# EAGLE board sra_20_v8.7 (EAGLE 9.5.2)
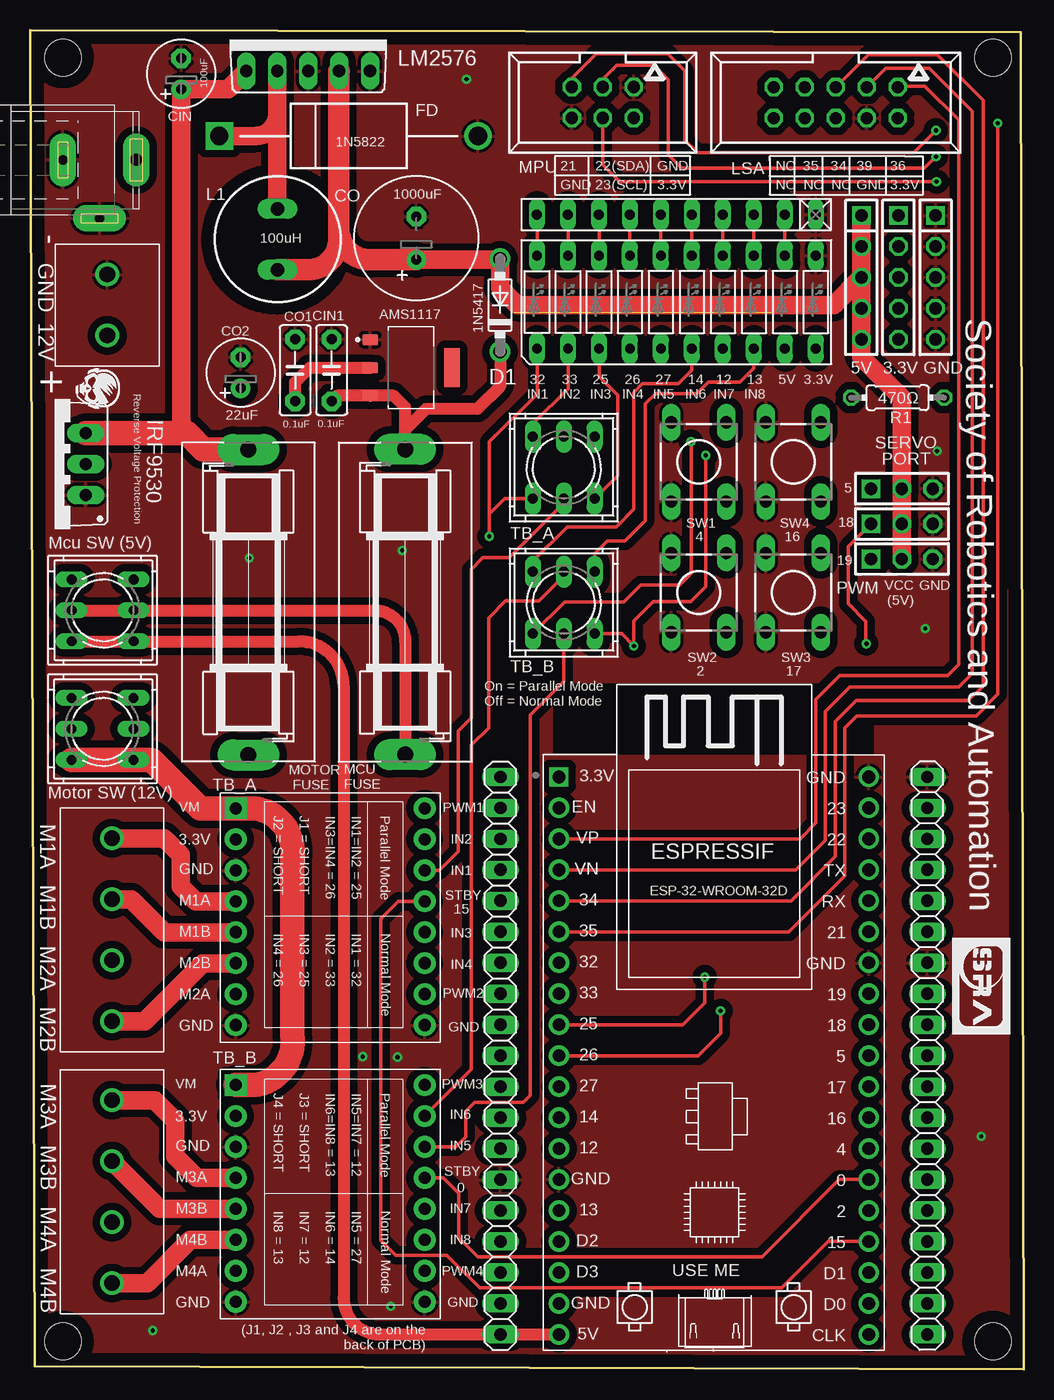
[diagram p0: board, top side]
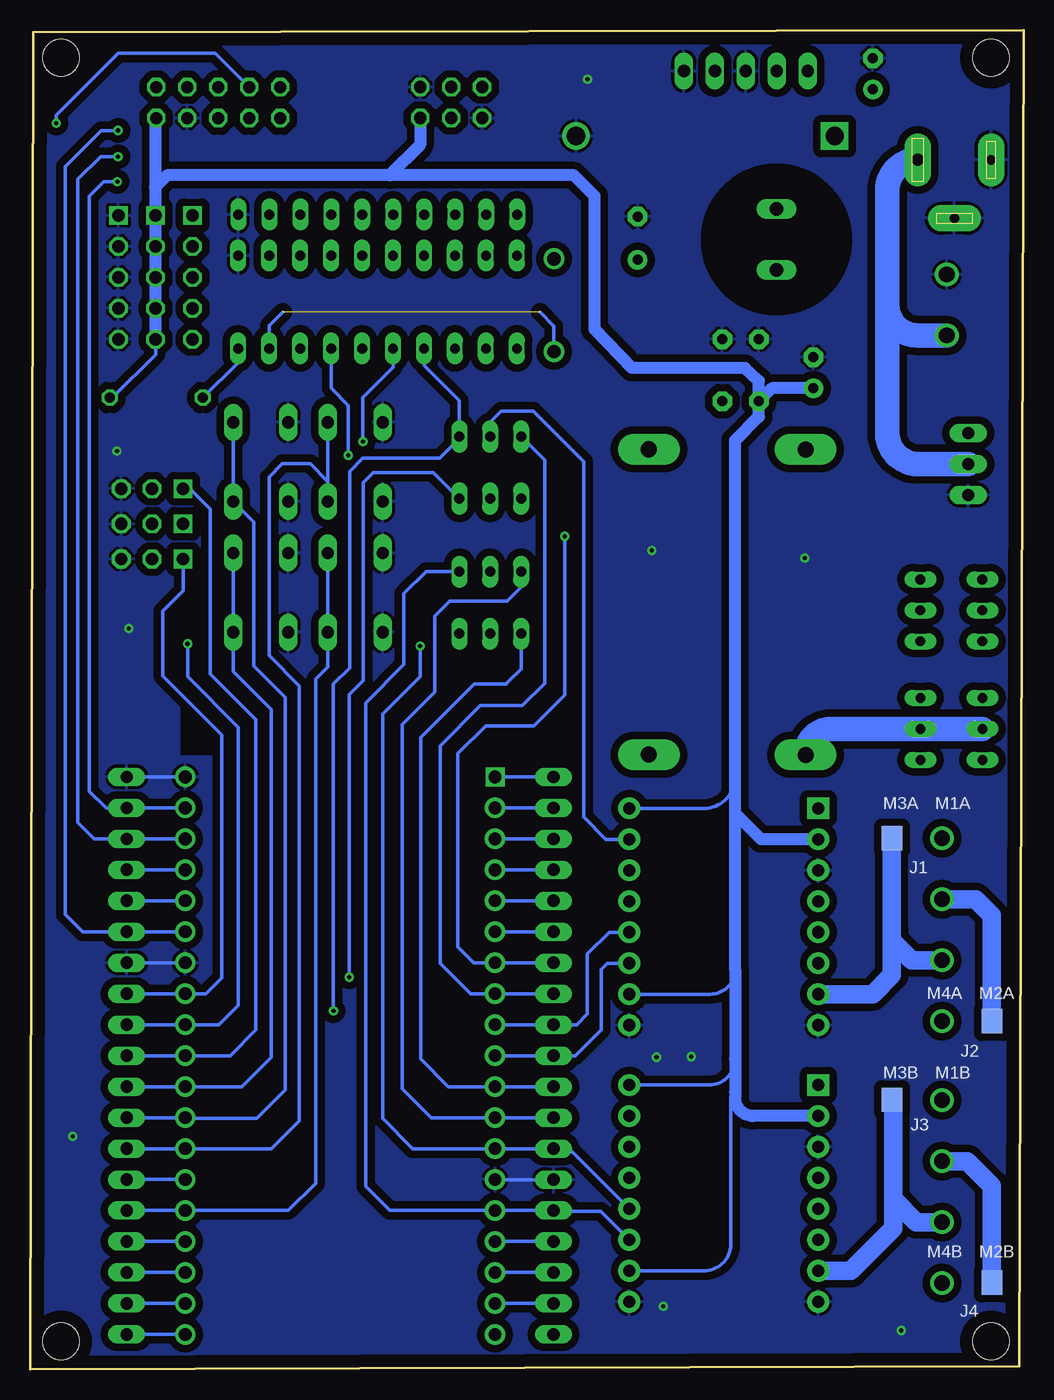
[diagram p1: board, bottom side, seen from below]

Size 81.41 x 109.77 mm. Coordinates in mm from the lower left corner, seen from the top.
Outline: 81.17,109.64 81.41,0 0.33,0.24 0,109.77 81.17,109.64
Copper layers (1*16): Top 0.035mm / dielectric 1.5mm / Bottom 0.035mm
Design rules "default": minimum track width 6mil, minimum drill 0.35mm, track to track 6mil, track to pad 6mil, pad to pad 6mil, via to via 6mil, smd to smd 6mil, copper to edge 40mil, drill to drill 6mil, minimum pad ring 10mil, minimum via ring 8mil, stop-mask expansion 4mil, vias tented up to drill 0mil, thermal gap 10mil
Holes 3 mm at 2.67,2.27 78.9,2.27 2.67,107.54 78.9,107.54

## Footprints (pad centres in the part's own frame; a part is rotated, then mirrored left to right if it is on the bottom)
691131710002 = drill 1.3: 1 -2.5,0; 2 2.5,0
SOT229P700X180-4N = smd 0.93 x 1.31: 1 -2.29,-3.345; 2 0,-3.345; 3 2.29,-3.345 | smd 3.24 x 1.31: 4 0,3.345
E2,5-6 = drill 0.813 pad 1.6: + -1.27,0 | drill 0.813 pad 1.6 octagon: - 1.27,0
C5B2.5 = drill 0.813 pad 1.6 octagon: 1 -2.54,0; 2 2.54,0
E3,5-10 = drill 0.813 pad 1.6: + -1.778,0 | drill 0.813 pad 1.6 octagon: - 1.778,0
DO41-7.6 = drill 1.1 pad 1.7: A 3.81,0; C -3.81,0
SH25 = drill 1.321 pad 2.54 long: 1 -12.522,0; 2 12.522,0
DIOAD2120W130L950D530P = drill 1.5 pad 2.25: A 10.6,0 | drill 1.5 pad 2.25 square: C -10.6,0
691131710004 = drill 1.3: 1 -7.5,0; 2 -2.5,0; 3 2.5,0; 4 7.5,0
1X19 = drill 1.016 long: 1 -22.86,0; 2 -20.32,0; 3 -17.78,0; 4 -15.24,0; 5 -12.7,0; 6 -10.16,0; 7 -7.62,0; 8 -5.08,0; 9 -2.54,0; 10 0,0; 11 2.54,0; 12 5.08,0; 13 7.62,0; 14 10.16,0; 15 12.7,0; 16 15.24,0; 17 17.78,0; 18 20.32,0; 19 22.86,0
1X03 = drill 1.016 square: 1 -2.54,0 | drill 1.016 octagon: 2 0,0; 3 2.54,0
1X05 = drill 1.016 square: 1 -5.08,0 | drill 1.016 octagon: 2 -2.54,0; 3 0,0; 4 2.54,0; 5 5.08,0
1X05' = drill 1.016 long: 1 -5.08,0; 2 -2.54,0; 3 0,0; 4 2.54,0; 5 5.08,0
SD12K100 = drill 1.1 long: 1 -2.5,0; 2 2.5,0
LB10 = drill 0.813 long: 1 -11.43,-3.81; 2 -8.89,-3.81; 3 -6.35,-3.81; 4 -3.81,-3.81; 5 -1.27,-3.81; 6 1.27,-3.81; 7 3.81,-3.81; 8 6.35,-3.81; 9 8.89,-3.81; 10 11.43,-3.81; 11 11.43,3.81; 12 8.89,3.81; 13 6.35,3.81; 14 3.81,3.81; 15 1.27,3.81; 16 -1.27,3.81; 17 -3.81,3.81; 18 -6.35,3.81; 19 -8.89,3.81; 20 -11.43,3.81
057-010-1 = drill 1 octagon: 1 -5.08,-1.27; 2 -5.08,1.27; 3 -2.54,-1.27; 4 -2.54,1.27; 5 0,-1.27; 6 0,1.27; 7 2.54,-1.27; 8 2.54,1.27; 9 5.08,-1.27; 10 5.08,1.27
9077-2 = drill 0.813 long: 1 -2.54,2.54; 2 0,2.54; 3 2.54,2.54; 4 -2.54,-2.54; 5 0,-2.54; 6 2.54,-2.54
SMD1,27-2,54 = smd 1.7 x 2 bottom: 1 0,0
SPC4078 = drill 0.8 pad 2.184 long: 1 -3,0; 2 0,-4.8 | drill 1 pad 2.184 long: 3 3,0
TO220BV = drill 1.016 long: D 0,-2.54; G -2.54,-2.54; S 2.54,-2.54
0204/7 = drill 0.813 octagon: 1 -3.81,0; 2 3.81,0
RN-10 = drill 0.813 long: 1 -11.43,0; 2 -8.89,0; 3 -6.35,0; 4 -3.81,0; 5 -1.27,0; 6 1.27,0; 7 3.81,0; 8 6.35,0; 9 8.89,0; 10 11.43,0
DTS-6 = drill 1 long: 1 -3.25,2.25; 2 3.25,2.25; 3 -3.25,-2.25; 4 3.25,-2.25
TB6612FNG = drill 1 pad 1.778: A1 -7.62,-1.27; A2 -7.62,-3.81; AIN1 7.874,1.27; AIN2 7.874,3.81; B1 -7.62,-8.89; B2 -7.62,-6.35; BIN1 7.874,-3.81; BIN2 7.874,-6.35; GND1 -7.62,1.27; GND2 -7.62,-11.43; GND3 7.874,-11.43; PWMA 7.874,6.35; PWMB 7.874,-8.89; STBY 7.874,-1.27; VCC -7.62,3.81 | drill 1 pad 1.778 square: VM -7.62,6.35
MODULE_ESP32-DEVKITC-32D = drill 1.04 square: 1 -12.7,19.76 | drill 1.04 pad 1.676: 2 -12.7,17.22; 3 -12.7,14.68; 4 -12.7,12.14; 5 -12.7,9.6; 6 -12.7,7.06; 7 -12.7,4.52; 8 -12.7,1.98; 9 -12.7,-0.56; 10 -12.7,-3.1; 11 -12.7,-5.64; 12 -12.7,-8.18; 13 -12.7,-10.72; 14 -12.7,-13.26; 15 -12.7,-15.8; 16 -12.7,-18.34; 17 -12.7,-20.88; 18 -12.7,-23.42; 19 -12.7,-25.96; 20 12.7,19.76; 21 12.7,17.22; 22 12.7,14.68; 23 12.7,12.14; 24 12.7,9.6; 25 12.7,7.06; 26 12.7,4.52; 27 12.7,1.98; 28 12.7,-0.56; 29 12.7,-3.1; 30 12.7,-5.64; 31 12.7,-8.18; 32 12.7,-10.72; 33 12.7,-13.26; 34 12.7,-15.8; 35 12.7,-18.34; 36 12.7,-20.88; 37 12.7,-23.42; 38 12.7,-25.96
057-006-1 = drill 1 octagon: 1 -2.54,-1.27; 2 -2.54,1.27; 3 0,-1.27; 4 0,1.27; 5 2.54,-1.27; 6 2.54,1.27

## Placement (x,y rotation side)
12V  [691131710002]  6.29,87.27 90 top
AMS1117  AMS1117-3.3  [SOT229P700X180-4N]  31.21,82.12 270 top
CIN  100uF  [E2,5-6]  12.36,106.22 90 top
CIN1  0.1uF  [C5B2.5]  24.69,81.91 270 top
CO  1000uF  [E3,5-10]  31.63,92.74 90 top
CO1  0.1uF  [C5B2.5]  21.69,81.91 270 top
CO2  22uF  [E2,5-6]  17.22,81.7 90 top
D1  1N5817-B  [DO41-7.6]  38.49,87.25 90 top
F2  3A  [SH25]  30.72,62.91 90 top
F3  3A  [SH25]  17.86,62.89 270 top
FD  1N5822  [DIOAD2120W130L950D530P]  26.08,101.12 0 top
J1  [691131710004]  6.68,36.03 270 top
J2  [691131710004]  6.68,14.55 270 top
JP1  [1X19]  73.52,25.7 270 top
JP2  [1X19]  38.52,25.7 90 top
JP3  [1X03]  71.43,66.43 0 top
JP4  [1X05]  74.2,89.53 270 top
JP5  [1X03]  71.43,69.31 0 top
JP6  [1X05']  22.77,106.44 0 top
JP7  [1X05]  68.12,89.53 270 top
JP8  [1X03]  71.43,72.2 0 top
JP10  [1X05]  71.16,89.53 270 top
L1  100uH  [SD12K100]  20.26,92.65 90 top
LDZ1  LB10  [LB10]  52.96,87.51 0 top
LINE-SENSOR  057-010-1  [057-010-1]  66.02,103.86 180 top
MCU-S/W  9077-2  [9077-2]  5.92,62.22 90 top
MOTOR-S/W  9077-2  [9077-2]  5.9,52.5 90 top
PAD1  [SMD1,27-2,54]  10.79,43.53 0 top
PAD2  [SMD1,27-2,54]  2.59,28.53 0 top
PAD3  [SMD1,27-2,54]  10.79,22.08 0 top
PAD4  [SMD1,27-2,54]  2.59,7.08 0 top
POWER-JACK  [SPC4078]  5.66,99.17 0 top
Q2  IRF9530  [TO220BV]  1.99,74.22 90 top
R1  470Ω  [0204/7]  71.09,79.66 0 top
RN2  [RN-10]  52.94,94.68 180 top
SW1  DTS-6  [DTS-6]  54.78,74.39 270 top
SW2  DTS-6  [DTS-6]  54.78,63.68 270 top
SW3  DTS-6  [DTS-6]  62.53,63.68 270 top
SW4  DTS-6  [DTS-6]  62.53,74.39 270 top
TB1  TB6612FNG  [TB6612FNG]  24.44,39.63 0 top
TB2  TB6612FNG  [TB6612FNG]  24.44,16.94 0 top
TB_A  9077-2  [9077-2]  43.72,73.93 180 top
TB_B  9077-2  [9077-2]  43.72,62.84 180 top
U1  ESP32-DEVKITC-32D  [MODULE_ESP32-DEVKITC-32D]  56.02,28.8 0 top
X1  057-006-1  [057-006-1]  46.92,103.87 180 top

## Library data of the parts
12V J1 J2 = Wurth_Elektronik_Electromechanic_Terminal_Blocks_Connectors_rev16b
AMS1117 = AMS1117-3.3; AVAILABILITY: Unavailable; DESCRIPTION: Sot223/Pkg 1-Amp 3.3-Volt Low Drop Out Voltage Regulatator; MF: Advanced Monolithic Systems; MP: AMS1117-3.3; PACKAGE: None; PRICE: None
CIN CO CO2 = rcl; SPICEPREFIX: C
CIN1 CO1 = capacitor-wima
D1 = diode
F2 F3 = fuse; MF: SCHURTER; MPN: 0031.8211; OC_FARNELL: 1162741; OC_NEWARK: 96B9380
FD = 1N5822; AVAILABILITY: Unavailable; MF: ON Semiconductor; MP: 1N5822; PACKAGE: DO-201AD-201 CDIL; PRICE: None
JP1 JP2 JP6 = pinhead
JP3-JP5 JP7 JP8 JP10 = pinhead_2
L1 = inductor-neosid; OC_FARNELL: unknown; OC_NEWARK: unknown
LDZ1 = led
LINE-SENSOR X1 = con-panduit; OC_FARNELL: unknown; OC_NEWARK: unknown
MCU-S/W MOTOR-S/W TB_A TB_B = switch-misc
PAD1-PAD4 = wirepad_2
POWER-JACK = con-jack; OC_FARNELL: unknown; OC_NEWARK: unknown
Q2 = transistor-power
R1 = rcl; SPICEPREFIX: R
RN2 = resistor-net; OC_FARNELL: unknown; OC_NEWARK: unknown
SW1-SW4 = switch-tact
TB1 TB2 = TB6612FNG
U1 = ESP32-DEVKITC-32D; AVAILABILITY: Unavailable; DESCRIPTION: - Transceiver; 802.11 b/g/n _Wi-Fi, WiFi, WLAN_, Bluetooth® Smart Ready 4.x Dual Mode For Use With ESP-WROOM-32; MF: Espressif Systems; MP: ESP32-DEVKITC-32D; PACKAGE: None; PRICE: None

## Nets
0: 12V.2 AMS1117.1 CIN1.1 CIN.- CO1.1 CO2.- CO.- FD.A JP1.1 JP1.7 JP2.6 JP3.3 JP4.1 JP4.2 JP4.3 JP4.4 JP4.5 JP5.3 JP6.3 JP6.5 JP8.3 LDZ1.11 LINE-SENSOR.4 POWER-JACK.1 POWER-JACK.2 Q2.G RN2.1 SW1.3 SW1.4 SW2.3 SW2.4 SW3.3 SW3.4 SW4.3 SW4.4 TB1.GND1 TB1.GND2 TB1.GND3 TB2.GND1 TB2.GND2 TB2.GND3 U1.14 U1.20 U1.26 X1.1 X1.6
2: JP1.15 SW2.1 SW2.2 U1.34
2L: LDZ1.20 RN2.10
3.3V: AMS1117.2 CO1.2 CO2.+ JP10.1 JP10.2 JP10.3 JP10.4 JP10.5 LINE-SENSOR.2 R1.2 TB1.PWMA TB1.PWMB TB1.VCC TB2.PWMA TB2.PWMB TB2.VCC X1.2
3L: LDZ1.19 RN2.9
3V3: JP2.19 U1.1
4: JP1.13 SW1.1 SW1.2 U1.32
4L: LDZ1.18 RN2.8
5: JP1.10 JP8.1 U1.29
5_AF: F2.1 MCU-S/W.2 MCU-S/W.5
5L: LDZ1.17 RN2.7
5V: CO.+ D1.A JP3.2 JP5.2 JP6.4 JP7.1 JP7.2 JP7.3 JP7.4 JP7.5 JP8.2 L1.1
5V_P: JP2.1 MCU-S/W.1 MCU-S/W.4 U1.19
6L: LDZ1.16 RN2.6
7L: LDZ1.15 RN2.5
8L: LDZ1.14 RN2.4
9L: LDZ1.13 RN2.3
10L: LDZ1.12 RN2.2
12: JP2.7 LDZ1.7 TB2.BIN1 TB_B.1 U1.13
12V: CIN.+ F3.1 JP6.1 Q2.S
12V_AF: F3.2 MOTOR-S/W.2 MOTOR-S/W.5
12V_P: MOTOR-S/W.1 MOTOR-S/W.4 TB1.VM TB2.VM
12V_U: 12V.1 POWER-JACK.3 Q2.D
13: JP2.5 LDZ1.8 TB2.BIN2 TB_B.4 U1.15
14: JP2.8 LDZ1.6 TB_B.6 U1.12
15: JP1.16 TB1.STBY U1.35
16: JP1.12 SW4.1 SW4.2 U1.31
17: JP1.11 SW3.1 SW3.2 U1.30
18: JP1.9 JP5.1 U1.28
19: JP1.8 JP3.1 U1.27
21: JP1.6 U1.25 X1.5
22: JP1.3 U1.22 X1.3
23: JP1.2 U1.21 X1.4
25: JP2.11 LDZ1.3 TB1.BIN1 TB_A.1 U1.9
26: JP2.10 LDZ1.4 TB1.BIN2 TB_A.4 U1.10
27: JP2.9 LDZ1.5 TB_B.3 U1.11
32: JP2.13 LDZ1.1 TB_A.3 U1.7
33: JP2.12 LDZ1.2 TB_A.6 U1.8
34: JP2.15 LINE-SENSOR.5 U1.5
35: JP2.14 LINE-SENSOR.7 U1.6
36: JP2.17 LINE-SENSOR.1 U1.3
39: JP2.16 LINE-SENSOR.3 U1.4
AIN1: TB1.AIN1 TB_A.2
AIN2: TB1.AIN2 TB_A.5
AMS_IN: AMS1117.3 CIN1.2 D1.C F2.2 LDZ1.9
BIN1: TB2.AIN1 TB_B.2
BIN2: TB2.AIN2 TB_B.5
CLK: JP1.19 U1.38
CMD: JP2.2 U1.18
EN: JP2.18 U1.2
N$1: LDZ1.10 R1.1
N$11: FD.C JP6.2 L1.2
NC1: LINE-SENSOR.6
NC2: LINE-SENSOR.8
NC3: LINE-SENSOR.10
NC4: LINE-SENSOR.9
O: JP1.14 TB2.STBY U1.33
OUT1A: J1.1 TB1.A1
OUT1B: J2.1 TB2.A1
OUT2A: J1.2 PAD2.1 TB1.A2
OUT2B: J2.2 PAD4.1 TB2.A2
OUT3A: J1.3 PAD1.1 TB1.B1
OUT3B: J2.3 PAD3.1 TB2.B1
OUT4A: J1.4 TB1.B2
OUT4B: J2.4 TB2.B2
RX: JP1.5 U1.24
SD0: JP1.18 U1.37
SD1: JP1.17 U1.36
SD2: JP2.4 U1.16
SD3: JP2.3 U1.17
TX: JP1.4 U1.23

## Tracks (layer width: path | path; a pad name or v marks a point on that pad's centre or on a via)
0  (via drill 0.35)
  Bottom 0.305: JP2.6 U1.14 | U1.26 JP1.7 | U1.20 JP1.1
  other vias: 29.53,5.15 77.94,19.08 30.47,67.13 17.93,66.5 10.03,3.16 30.09,25.57 27.24,25.62 35.74,105.78 74.33,75.28 73.35,60.74
  pour Bottom (isolate 0.61, rank 2): -2.4,110.93 -2.4,-1.76 4.43,-1.76 83.17,-1.76 83.17,5.02 83.17,110.94 -2.4,110.94
  pour Top (isolate 0.61, rank 2): -2.39,110.92 -2.39,-1.77 0.35,-1.77 83.18,-1.77 83.18,3.12 83.18,110.93 -2.39,110.93
  cutout Top: 42.95,50.39 42.95,56.14 43,56.19 69.05,56.19 69.05,50.44 42.95,50.44
  cutout Bottom: 42.95,50.39 42.95,56.19 48.9,56.19 69.05,56.19 69.05,50.44 42.95,50.44
2
  Bottom 0.305: SW2.1 SW2.2 57.03,57.58 58.04,56.57 58.04,15.22 60.26,13 U1.34 JP1.15
2L
  Top 0.305: LDZ1.20 41.53,94.67 RN2.10
3.3V
  Top 1: CO1.2 21.69,80.93 22.88,82.12 AMS1117.2
  Bottom 0.305: TB1.PWMB 25.68,30.74 arc-90 23.65,32.77 | TB2.PWMA 25.79,23.29 arc-90 23.65,25.44 | TB2.PWMB 26.19,8.05 arc-90 24.01,10.23 24.01,22.36 23.65,22.72 | TB1.PWMA 26.17,45.98 arc-90 23.65,48.5 | JP10.5 71.16,83.21 74.7,79.66 R1.2
  Bottom 1: TB2.VCC 22.15,20.75 arc90 23.65,22.26 23.65,22.72 23.65,25.44 23.65,32.77 23.65,45.58 | CO2.+ 20.63,80.43 CO1.2 | CO1.2 21.69,81.03 22.85,82.09 32.08,82.09 35.16,85.26 35.16,96.2 36.86,97.89 51.95,97.89 | 71.19,96.92 70.21,97.89 51.95,97.89 | 71.19,96.92 71.2,96.91 71.2,102.49 LINE-SENSOR.2 | 71.19,96.92 71.19,94.64 JP10.1 JP10.2 JP10.3 JP10.4 JP10.5 | X1.2 49.46,100.38 51.95,97.89 | 23.65,45.58 23.65,48.5 23.65,76.14 21.69,78.1 CO1.2 | TB1.VCC 21.51,43.44 23.65,45.58
3L
  Top 0.305: LDZ1.19 44.07,94.67 RN2.9
3V3
  Bottom 0.305: JP2.19 U1.1
4
  Bottom 0.305: SW1.1 SW1.2 57.03,72.79 58.48,74.24 60.77,74.24 61.85,73.17 61.85,58.5 59.37,56.02 59.37,20.36 61.65,18.08 U1.32 JP1.13
4L
  Top 0.305: LDZ1.18 46.61,94.67 RN2.8
5
  Bottom 0.305: JP1.10 U1.29 65.04,25.7 62.93,27.81 62.93,53.25 66.67,56.99 66.67,70.53 68.34,72.2 JP8.1
5_AF
  Top 1: MCU-S/W.2 MCU-S/W.5 28.18,62.22 arc-90 30.72,59.68 F2.1
5L
  Top 0.305: LDZ1.17 49.15,94.67 RN2.7
5V
  Top 1.5: JP7.3 JP7.4 JP7.5 68.12,82.99 71.43,79.67 JP8.2 JP5.2 JP3.2 | JP7.3 JP7.2 JP7.1 | JP7.3 65.86,87.27 39.89,87.27 38.49,88.66 D1.A 38.4,90.96 CO.+
  Top 1.75: 25.28,93.5 25.28,92.69 arc-90 22.74,90.15 L1.1 | CO.+ 27.82,90.96 arc-90 25.28,93.5 | 25.28,93.5 25.28,106.41 arc-90 JP6.4
5V_P
  Top 1: U1.19 arc90 U1.19 arc-90 U1.19 | MCU-S/W.1 MCU-S/W.4 22.01,59.68 arc-90 25.67,56.02 25.67,5.82 arc90 28.66,2.83 JP2.1 U1.19
6L
  Top 0.305: LDZ1.16 51.69,94.67 RN2.6
7L
  Top 0.305: LDZ1.15 54.23,94.67 RN2.5
8L
  Top 0.305: LDZ1.14 56.77,94.67 RN2.4
9L
  Top 0.305: LDZ1.13 59.31,94.67 RN2.3
10L
  Top 0.305: LDZ1.12 61.85,94.67 RN2.2
12  (via drill 0.35)
  Top 0.305: TB_B.1 48.46,60.3 v49.47,59.29 49.47,61.35 51.06,62.94 54.14,62.94 55.37,64.17 v55.37,74.94
  Bottom 0.305: v49.47,59.29 49.47,56.78 52.54,53.71 52.54,20.55 50.06,18.08 U1.13 JP2.7 37.26,18.07 TB2.BIN1 | LDZ1.7 56.77,80.43 55.37,79.03 v55.37,74.94
12V
  Top 1.5: JP6.1 16.19,104.95 CIN.+ 12.36,77.46 14.41,75.41 15.08,75.41
  Top 2: Q2.S 12.84,76.76 14.18,75.41 15.08,75.41 F3.1
12V_AF
  Bottom 2: F3.2 arc90 15.73,52.5 MOTOR-S/W.5 MOTOR-S/W.2
12V_P
  Top 2: TB2.VM 18.39,23.29 arc90 21.46,27.36 21.46,41.91 arc90 18.39,45.98 TB1.VM 13.93,45.98 9.95,49.96 MOTOR-S/W.4 MOTOR-S/W.1
12V_U
  Bottom 2: Q2.D 8.62,74.22 arc90 11.16,76.76 11.16,87.25 | POWER-JACK.3 arc-90 11.16,96.67 11.16,87.25 | 12V.1 8.68,84.77 arc90 11.16,87.25
13
  Top 0.305: TB_B.4 46.26,66.88 47.27,67.9 48.72,67.9 50.4,69.58 50.4,79.16 51.25,80 54.61,80 55.55,80.94 58.16,80.94 59.31,82.08 LDZ1.8
  Bottom 0.305: TB_B.4 46.28,65.41 48.98,65.41 50.8,63.6 50.8,57.77 53.94,54.62 53.94,15 51.94,13 U1.15 JP2.5 38.48,12.95 34.67,12.95 TB2.BIN2
14
  Top 0.305: LDZ1.6 54.23,81.91 53.11,80.79 50.17,80.79 49.47,80.09 49.47,70.51 48.02,69.07 43.99,69.07 41.15,66.23 41.15,65.42 TB_B.6
  Bottom 0.305: TB_B.6 41.18,64.13 42.31,63 47.03,63 48.26,61.76 48.26,55.51 50.92,52.86 50.92,22.99 48.55,20.62 U1.12 JP2.8
15
  Top 0.305: U1.35 65.42,10.46 61.6,6.64 36.82,6.64 34.12,9.33 29.94,9.33 28.71,10.56 28.71,36.93 30.14,38.36 TB1.STBY
  Bottom 0.305: U1.35 JP1.16
16
  Bottom 0.305: SW4.1 SW4.2 63.11,69.47 63.11,57.66 60.51,55.07 60.51,22.89 62.87,20.54 68.64,20.54 U1.31 JP1.12
17
  Bottom 0.305: JP1.11 U1.30 64.07,23.16 61.65,25.57 61.65,54.07 64.78,57.19 SW3.2 SW3.1
18  (via drill 0.35)
  Top 0.305: JP5.1 67.03,67.45 67.03,62.77 68.5,61.31 68.5,59.49 v68.53,59.49
  Bottom 0.305: v68.53,59.49 68.53,56.78 64.36,52.61 64.36,29.83 65.96,28.24 U1.28 JP1.9
19
  Bottom 0.305: JP3.1 68.89,63.85 70.58,62.16 70.58,56.83 65.72,51.98 65.72,32.09 67.04,30.78 U1.27 JP1.8
21  (via drill 0.35)
  Top 0.305: X1.5 44.38,105.87 46.39,107.88 52.23,107.88 53.64,106.48 53.64,100.79 54.69,99.74 72.4,99.74 v74.23,101.57
  Bottom 0.305: v74.23,101.57 75.59,101.57 78.55,98.61 78.55,37.3 77.1,35.85 JP1.6 U1.25
22  (via drill 0.35)
  Top 0.305: X1.3 46.92,105.78 48.07,106.93 51.08,106.93 52.28,105.73 52.28,99.58 53.37,98.48 73.28,98.48 v74.23,99.43
  Bottom 0.305: v74.23,99.43 75.65,99.43 77.52,97.56 77.52,44.82 76.17,43.47 JP1.3 U1.22
23  (via drill 0.35)
  Top 0.305: X1.4 46.92,98.76 48.31,97.37 v74.29,97.37
  Bottom 0.305: v74.29,97.37 75.41,97.37 76.59,96.19 76.59,93.28 76.58,93.27 76.58,47.38 75.21,46.01 JP1.2 U1.21
25  (via drill 0.35)
  Top 0.305: v55.27,32.14 55.27,30.03 53.48,28.24 U1.9 | LDZ1.3 46.61,81.39 48.14,79.86 48.14,73.27 TB_A.1
  Bottom 0.305: TB_A.1 48.39,73.52 53.3,73.52 54.12,72.69 54.12,56.46 55.27,55.31 v55.27,32.15 v55.27,32.14 | TB1.BIN1 33.98,35.82 35.75,34.05 35.75,29.11 36.63,28.23 JP2.11 U1.9
26  (via drill 0.35)
  Top 0.305: v56.58,29.38 56.58,27.53 54.75,25.7 U1.10
  Bottom 0.305: v56.58,29.38 56.58,56.16 55.23,57.5 55.23,73.61 54.15,74.69 47.88,74.69 47.88,74.7 46.26,76.32 TB_A.4 46.26,79.41 49.15,82.29 LDZ1.4 | TB1.BIN2 34.11,33.28 34.63,32.76 34.63,27.82 36.76,25.69 JP2.10 U1.10
27  (via drill 0.35)
  Top 0.305: v54.15,76.05 54.15,65.22 53.21,64.28 50.01,64.28 48.65,62.91 43.79,62.91 TB_B.3
  Bottom 0.305: TB_B.3 41.18,57.42 42.26,56.34 42.37,56.24 42.41,56.19 45.03,56.19 49.42,51.8 49.42,25.43 47.15,23.16 U1.11 JP2.9 | LDZ1.5 51.69,82.15 54.15,79.68 v54.15,76.05
32  (via drill 0.35)
  Top 0.305: v37.61,68.28 37.61,70.12 | 37.61,70.12 38.88,71.39 TB_A.3 | 37.61,70.12 37.61,76.05 41.53,79.97 LDZ1.1
  Bottom 0.305: v37.61,68.28 37.61,55.29 40.15,52.75 44.08,52.75 46.36,50.47 46.36,34.61 45.07,33.32 U1.7 JP2.13
33
  Top 0.305: TB_A.6 41.18,77.52 44.07,80.41 LDZ1.2
  Bottom 0.305: TB_A.6 39.26,74.55 39.26,56.24 41.1,54.4 44.52,54.4 47.82,51.1 47.82,33.28 45.32,30.78 U1.8 JP2.12
34
  Top 0.305: U1.5 62.35,38.4 65.98,42.02 65.98,53.1 67.68,54.81 76.89,54.81 78.1,56.01 78.1,104.04 74.34,107.8 68.69,107.8 LINE-SENSOR.5
  Bottom 0.305: JP2.15 U1.5
35  (via drill 0.35)
  Top 0.305: U1.6 62.14,35.86 66.73,40.45 66.73,52.56 67.74,53.57 77.52,53.57 79.3,55.36 v79.3,102.17
  Bottom 0.305: v79.3,102.17 79.3,102.84 74.23,107.92 66.26,107.92 LINE-SENSOR.7 | JP2.14 U1.6
36
  Top 0.305: U1.3 63.09,43.48 64.38,44.77 64.38,54.92 66.34,56.88 75.2,56.88 76.09,57.77 76.09,102.46 73.33,105.22 71.19,105.22 LINE-SENSOR.1
  Bottom 0.305: JP2.17 U1.3
39
  Top 0.305: U1.4 62.74,40.94 65.16,43.36 65.16,53.91 67.18,55.93 76.1,55.93 77.2,57.04 77.2,103.15 73.67,106.68 70.11,106.68 LINE-SENSOR.3
  Bottom 0.305: JP2.16 U1.4
AIN1
  Top 0.305: TB1.AIN1 33.52,40.9 35.08,42.46 35.08,52.34 36.14,53.4 36.14,65.58 37.1,66.54 39.25,66.54 43.72,71.01 TB_A.2
AIN2
  Bottom 0.305: TB1.AIN2 34.23,43.44 36.06,45.26 36.06,74.42 40.21,78.57 42.81,78.57 43.72,77.66 TB_A.5
AMS_IN  (1 unrouted)
  Top 1: F2.2 30.72,77.04 | 30.72,77.04 30.72,78.89 29.78,79.83 AMS1117.3 25.14,79.83 CIN1.2 | D1.C 38.49,80.58 36.64,78.73 32.41,78.73 30.72,77.04
  Bottom 0.305: D1.C 38.49,85.54 39.63,86.68 | LDZ1.9 61.85,85.56 60.73,86.68
BIN1
  Top 0.305: TB2.AIN1 34.88,18.21 35.7,19.03 35.7,21.14 36.43,21.87 40.4,21.87 40.97,22.44 40.97,53.63 43.72,56.37 TB_B.2
BIN2
  Top 0.305: TB2.AIN2 36.15,24.58 36.15,51.19 37.55,52.59 37.55,61.61 38.95,63.01 39.08,63.01 39.11,62.98 41.67,62.98 43.72,65.03 TB_B.5
CLK
  Bottom 0.305: U1.38 JP1.19
CMD
  Bottom 0.305: JP2.2 U1.18
COB
  cutout Bottom: 14.1,92.57 14.1,92.62 arc-90 20.26,98.78 arc-90 26.39,92.65 26.39,92.57 arc-90 20.32,86.5 20.22,86.5 20.19,86.5 arc-90 14.1,92.59
COT
  cutout Top: 14.09,92.59 14.09,92.65 arc-90 20.25,98.8 arc-90 26.38,92.67 26.38,92.59 arc-90 20.31,86.52 20.2,86.52 20.18,86.52 arc-90 14.09,92.61
EN
  Bottom 0.305: JP2.18 U1.2
N$1
  Bottom 0.305: R1.1 64.39,82.55 LDZ1.10
N$11
  Top 1.5: JP6.2 20.23,102.92 | 20.23,102.92 20.23,95.18 arc90 L1.2 | FD.C 18.42,101.12 arc90 20.23,102.92
O
  Top 0.305: U1.33 66.32,15.54 59.99,9.21 36.66,9.21 35.12,10.75 35.12,14.39 33.84,15.67 TB2.STBY
  Bottom 0.305: U1.33 JP1.14
OUT1A
  Top 1.5: TB1.A1 13.55,38.36 12.32,39.59 12.32,42.16 10.95,43.53 J1.1
OUT1B
  Top 1.5: J2.1 10.17,22.05 11.86,20.36 11.86,17.44 13.62,15.67 TB2.A1
OUT2A
  Top 1.5: TB1.A2 10.96,35.82 8.25,38.53 J1.2
  Bottom 1.5: PAD2.1 2.59,37.19 3.92,38.53 J1.2
OUT2B
  Top 1.5: TB2.A2 10.6,13.13 J2.2
  Bottom 1.5: PAD4.1 2.59,15.04 4.6,17.05 J2.2
OUT3A
  Bottom 1.5: J1.3 9.18,33.53 10.79,35.14 | 10.79,35.14 10.79,35.95 PAD1.1 | TB1.B1 12.35,30.74 10.79,32.3 10.79,35.14
OUT3B
  Bottom 1.5: TB2.B1 14.16,8.05 10.68,11.54 10.68,13.95 | 10.68,13.95 10.68,21.97 PAD3.1 | J2.3 8.78,12.05 10.68,13.95
OUT4A
  Top 1.5: J1.4 9.36,28.53 14.11,33.28 TB1.B2
OUT4B
  Top 1.5: J2.4 9.57,7.05 13.12,10.59 TB2.B2
RX
  Bottom 0.305: U1.24 JP1.5
SD0
  Bottom 0.305: U1.37 JP1.18
SD1
  Bottom 0.305: U1.36 JP1.17
SD2
  Bottom 0.305: JP2.4 U1.16
SD3
  Bottom 0.305: JP2.3 U1.17
TX
  Bottom 0.305: U1.23 JP1.4

## Text on the board
tPlace: LM2576 | - | GND | Society of Robotics and Automation | 12V | 1N5417 | Reverse Voltage Protection | + | Mcu SW (5V) | MOTOR / FUSE | MCU / FUSE | Motor SW (12V) | J2 = SHORT | J1 = SHORT | IN3=IN4 = 26 | IN1=IN2 = 25 | Parallel Mode | M1A | M1B | IN4 = 26 | IN3 = 25 | IN2 = 33 | IN1 = 32 | Normal Mode | M2A | M2B | C:/Users/User/Desktop/WhatsApp Image 2019-09-02 at 12.38.29 AM.bmp | M3A | J4 = SHORT | J3 = SHORT | IN6=IN8 = 13 | IN5=IN7 = 12 | Parallel Mode | M3B | M4A | IN8 = 13 | IN7 = 12 | IN6 = 14 | IN5 = 27 | Normal Mode | M4B | USE ME
bPlace: M1A | M3A | J1 | M2A | M4A | J2 | M1B | M3B | J3 | M2B | M4B | J4
tNames: MPU | 21 | 22(SDA) | GND | NC | 35 | 34 | 39 | 36 | LSA | GND | 23(SCL) | 3.3V | NC | NC | NC | GND | 3.3V | 5V | 3.3V | GND | 32 | 33 | 25 | 26 | 27 | 14 | 12 | 13 | 5V | 3.3V | IN1 | IN2 | IN3 | IN4 | IN5 | IN6 | IN7 | IN8 | SERVO | PORT | 5 | 18 | TB_A | SW1 | SW4 | 4 | 16 | 19 | PWM | VCC / (5V) | GND | TB_B | SW2 | SW3 | 2 | 17 | On = Parallel Mode / Off = Normal Mode | 3.3V | GND | TB_A | EN | 23 | VM | PWM1 | VP | IN2 | 22 | 3.3V | VN | TX | GND | IN1 | 34 | STBY | RX | M1A | 15 | 35 | 21 | M1B | IN3 | 32 | GND | M2B | IN4 | 33 | 19 | M2A | PWM2 | 25 | 18 | GND | GND | 26 | 5 | TB_B | 27 | 17 | VM | PWM3 | 14 | 16 | 3.3V | IN6 | 12 | 4 | GND | IN5 | GND | M3A | STBY | 0 | 0 | 13 | 2 | M3B | IN7 | D2 | M4B | IN8 | 15 | D3 | D1 | M4A | PWM4 | GND | GND | GND | D0 | (J1, J2 , J3 and J4 are on the / back of PCB) | 5V | CLK